# Altium PCB IR_detector_16ch.PcbDoc
Units mm, origin at the board's own origin, x right, y up, seen from the top; angles counter-clockwise.
Board outline 135 x 44 mm, 2 copper layers (Top Layer, Bottom Layer); 73 components, 68 nets, 390 pads, 179 vias.
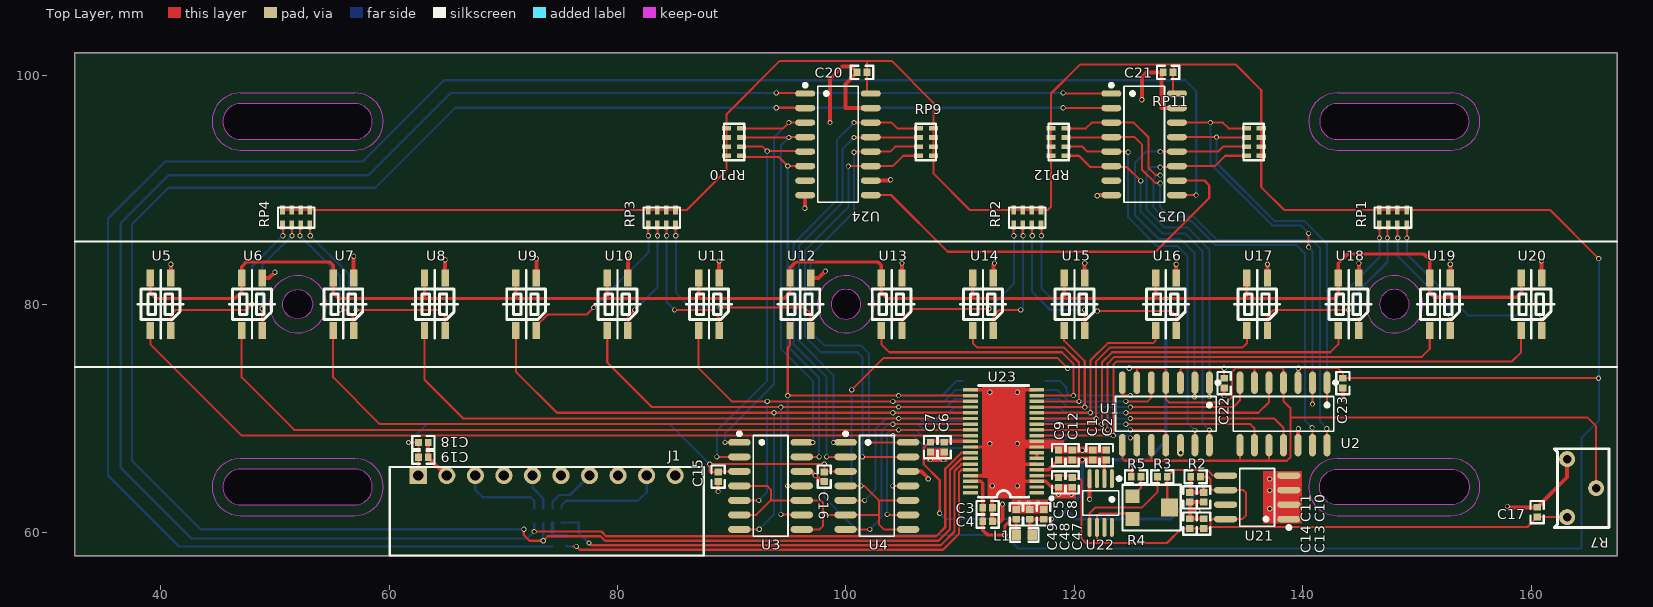
[diagram p0: Top Layer view]
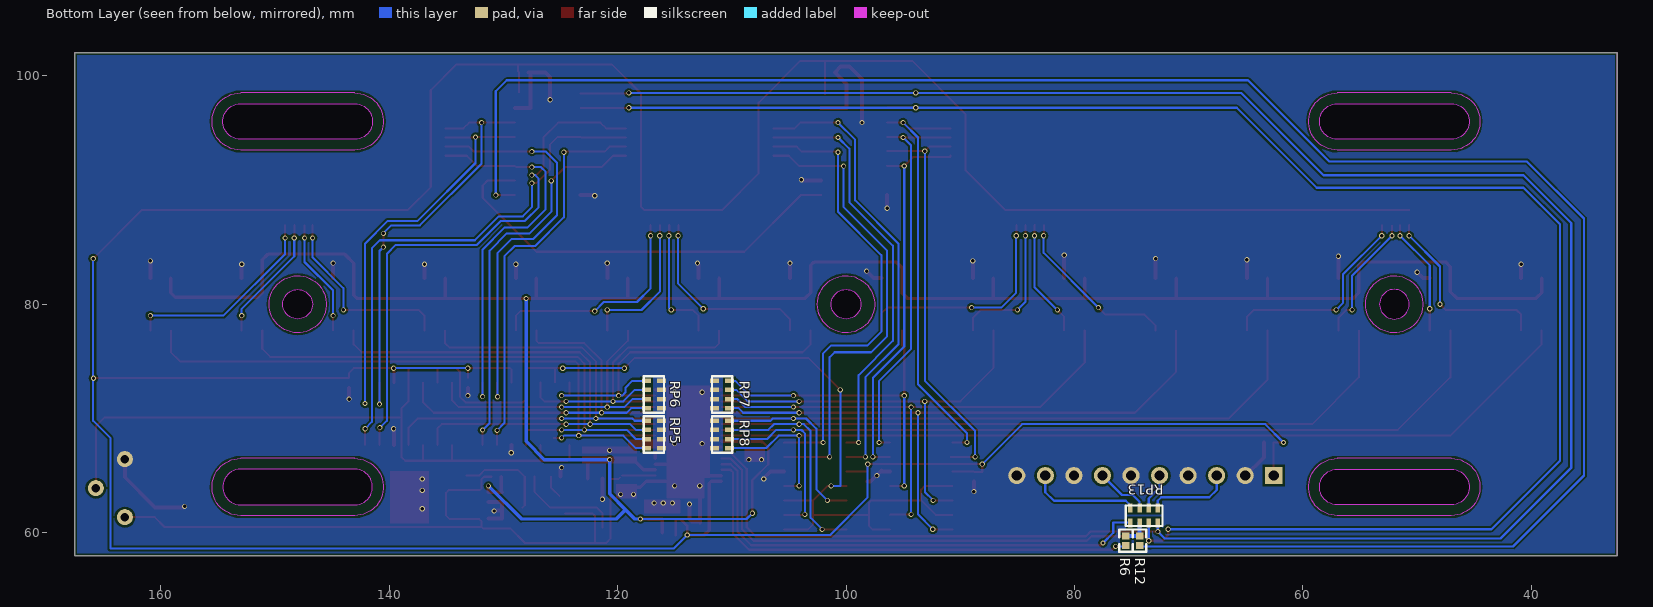
[diagram p1: Bottom Layer view, seen from below]

## Layer stack, top to bottom
Top Solder: solder mask 0.0102, Solder Resist, Dk 3.5
Top Layer: signal copper 0.0356
Dielectric 1: dielectric 0.32, FR-4, Dk 4.8
Bottom Layer: signal copper 0.0356
Bottom Solder: solder mask 0.0102, Solder Resist, Dk 3.5

## Board outline
32.5,58 167.5,58 167.5,102 32.5,102
cut-out: 146.7,80 ccw(c148,80) 148,78.7 ccw(c148,80) 149.3,80 ccw(c148,80) 148,81.3 ccw(c148,80)
cut-out: 98.7,80 ccw(c100,80) 100,78.7 ccw(c100,80) 101.3,80 ccw(c100,80) 100,81.3 ccw(c100,80)
cut-out: 52,78.7 cw(c52,80) 50.7,80 cw(c52,80) 52,81.3 cw(c52,80) 53.3,80 cw(c52,80)
cut-out: 47,94.45 57,94.45 ccw(c57,96) 57,97.55 47,97.55 ccw(c47,96)
cut-out: 143,94.45 153,94.45 ccw(c153,96) 153,97.55 143,97.55 ccw(c143,96)
cut-out: 143,62.45 cw(c143,64) 143,65.55 153,65.55 cw(c153,64) 153,62.45
cut-out: 47,62.45 57,62.45 ccw(c57,64) 57,65.55 47,65.55 ccw(c47,64)

## Design rules (kind name [scope] priority, off if disabled: settings)
AcuteAngle [All] p1: minimum=7.00000000000000E+0001 checktracksonly=FALSE
Clearance RF [InNetClass('RF') vs InNet('GND')] p1: gap=0.2
Clearance [All] p2: gap=0.15 except(0.1: Track-Track; 0.18: Arc-Via Via-Poly SMDPad-Via Track-Via Via-Fill THPad-Via Via-Via Via-Text; 0.2: THPad-Poly Arc-THPad THPad-Text SMDPad-THPad THPad-Fill Track-THPad THPad-THPad; 0.25: Region-Text; 0.5: Arc-Region Poly-Region THPad-Region Region-Region Text-Text Fill-Region SMDPad-Region Via-Region Track-Region)
ComponentClearance [All] p1: gap=0 collisioncheckmode=3 verticalgap=0 showdistances=FALSE
DiffPairsRouting [All] p1: maxlimit=0.254 minlimit=0.2 mostfreqgap=0.2 toplayer_minwidth=0.2 toplayer_maxwidth=0.381 toplayer_prefwidth=0.2 bottomlayer_minwidth=0.2 bottomlayer_maxwidth=0.381 bottomlayer_prefwidth=0.2 maxuncoupledlength=5
Height [All] p1: minheight=0 maxheight=254 prefheight=12.7
HoleSize [All] p1: absolutevalues=TRUE maxlimit=6.3 minlimit=0.2 maxpercent=80.000 minpercent=20.000
HoleToHoleClearance [All] p1: gap=0.2 allowstackedmicrovias=TRUE
MinimumSolderMaskSliver [All] p1: minsoldermaskwidth=0.089
PlaneConnect [All] p1: planeconnectstyle=Direct reliefexpansion=0.508 reliefentries=4 reliefconductorwidth=0.254 reliefairgap=0.254
PolygonConnect [All] p1: connectstyle=Direct reliefconductorwidth=0.254 reliefentries=4 polygonreliefangle="90 Angle" airgapwidth=0.254
RoutingVias [All] p1: holewidth=0.3 width=0.45 viastyle="Through Hole" minholewidth=0.3 minwidth=0.4 maxholewidth=0.711 maxwidth=1.27
SilkToBoardRegionClearance [All] p1 off:
SilkToSilkClearance [All] p1: silktosilkclearance=0
SilkToSolderMaskClearance [IsPad] p1: minsilkscreentomaskgap=0 clearancetoexposedcopper=TRUE
SolderMaskExpansion [All] p1: expansion=0.102
UnpouredPolygon [All] p1: allowunpoured=FALSE
UnpouredPolygon BoardOutlineClearance [All] p2: allowunpoured=FALSE
Width [All] p1: maxlimit=100 minlimit=0.13 preferedwidth=0.18
19 further rules are at their usual default settings.

## Components (designator, comment, footprint, x,y, rotation, side; value= is the part's Value field where it differs from the comment)
C1 "1uF" 0402 121.6,66.8 r270 top
C2 "0.1uF" 0402 122.8,66.8 r270 top
C3 "1uF" 0402 112.4,62.2 r0 top
C4 "0.1uF" 0402 112.4,61 r0 top
C5 "0.1uF" 0402 118.6,64.4 r90 top
C6 "1uF" 0402 108.6,67.5 r270 top
C7 "0.1uF" 0402 107.4,67.5 r270 top
C8 "10uF" 0402 119.8,64.4 r90 top
C9 "1uF" 0402 118.6,66.8 r90 top
C10 "(NC)0.1uF" 0402 131.3,63.1 r90 top
C11 "(NC)1uF" 0402 130.1,63.1 r90 top
C12 "0.1uF" 0402 119.8,66.8 r90 top
C13 "(NC)1uF" 0402 131.3,60.8 r270 top
C14 "(NC)0.1uF" 0402 130.1,60.8 r270 top
C15 "(NC)0.1uF" 0402 88.8,64.9 r90 top
C16 "(NC)0.1uF" 0402 98.1,64.9 r90 top
C17 "(NC)0.1uF" 0402 160.5,61.8 r270 top
C18 "1uF" 0402 63,67.9 r180 top
C19 "0.1uF" 0402 63,66.6 r180 top
C20 "(NC)0.1uF" 0402 101.4,100.3 r0 top
C21 "(NC)0.1uF" 0402 128.2,100.3 r0 top
C22 "(NC)0.1uF" 0402 133.1,73.1 r90 top
C23 "(NC)0.1uF" 0402 143.5,73.1 r90 top
C47 "10uF" 0402 117.3,61.6 r270 top
C48 "0.1uF" 0402 116.1,61.6 r270 top
C49 "1uF" 0402 114.9,61.6 r270 top
J1 "XH_10P" XH_10P直插弯针 73.8,65 r0 top
L1 "10uH" 0603 115.6,59.8 r0 top
R2 "(NC)150" 0402 130.6,64.9 r180 top
R3 "(NC)470" 0402 127.7,64.9 r0 top
R4 "(NC)10K" 3x3_ResPot 126.7,62.2 r270 top
R5 "(NC)1k" 0402 125.4,64.9 r0 top
R6 "0" 0402 75.5,59.3 r90 bottom
R7 "(NC)10K" 3362W-TH_3P-L7.1-W6.9-P2.54-BL-BS 164.4,63.9 r270 top
R12 "(NC)0" 0402 74.3,59.3 r90 bottom
RP1 "180" 8P4R-0603 147.873,87.6 r90 top
RP2 "180" 8P4R-0603 115.873,87.6 r90 top
RP3 "180" 8P4R-0603 83.873,87.6 r90 top
RP4 "180" 8P4R-0603 51.873,87.6 r90 top
RP5 "6.8K" 8P4R-0603 116.8,68.6 r180 bottom
RP6 "6.8K" 8P4R-0603 116.8,72.1 r180 bottom
RP7 "6.8K" 8P4R-0603 110.85,72.1 r0 bottom
RP8 "6.8K" 8P4R-0603 110.85,68.6 r0 bottom
RP9 "(NC)1K" 8P4R-0603 107,94.2 r0 top
RP10 "(NC)1K" 8P4R-0603 90.2,94.2 r180 top
RP11 "(NC)1K" 8P4R-0603 135.7,94.2 r0 top
RP12 "(NC)1K" 8P4R-0603 118.6,94.2 r180 top
RP13 "22" 8P4R-0603 73.9,61.5 r90 bottom
U1 "(NC)LM339" SOP-14_L8.6-W3.9-P1.27-LS6.0-BL 128,70.4 r180 top
U2 "(NC)LM339" SOP-14_L8.6-W3.9-P1.27-LS6.0-BL 138.3,70.4 r180 top
U3 "(NC)LM339" SOP-14_L8.6-W3.9-P1.27-LS6.0-BL 93.4,64.1 r270 top
U4 "(NC)LM339" SOP-14_L8.6-W3.9-P1.27-LS6.0-BL 102.7,64.1 r270 top
U5 "ITR8307/S17/TR8(B)" OPTO-SMD_ITR8307-S17-TR8-B-TS 40,80 r90 top
U6 "ITR8307/S17/TR8(B)" OPTO-SMD_ITR8307-S17-TR8-B-TS 48,80 r90 top
U7 "ITR8307/S17/TR8(B)" OPTO-SMD_ITR8307-S17-TR8-B-TS 56,80 r90 top
U8 "ITR8307/S17/TR8(B)" OPTO-SMD_ITR8307-S17-TR8-B-TS 64,80 r90 top
U9 "ITR8307/S17/TR8(B)" OPTO-SMD_ITR8307-S17-TR8-B-TS 72,80 r90 top
U10 "ITR8307/S17/TR8(B)" OPTO-SMD_ITR8307-S17-TR8-B-TS 80,80 r90 top
U11 "ITR8307/S17/TR8(B)" OPTO-SMD_ITR8307-S17-TR8-B-TS 88,80 r90 top
U12 "ITR8307/S17/TR8(B)" OPTO-SMD_ITR8307-S17-TR8-B-TS 96,80 r90 top
U13 "ITR8307/S17/TR8(B)" OPTO-SMD_ITR8307-S17-TR8-B-TS 104,80 r90 top
U14 "ITR8307/S17/TR8(B)" OPTO-SMD_ITR8307-S17-TR8-B-TS 112,80 r90 top
U15 "ITR8307/S17/TR8(B)" OPTO-SMD_ITR8307-S17-TR8-B-TS 120,80 r90 top
U16 "ITR8307/S17/TR8(B)" OPTO-SMD_ITR8307-S17-TR8-B-TS 128,80 r90 top
U17 "ITR8307/S17/TR8(B)" OPTO-SMD_ITR8307-S17-TR8-B-TS 136,80 r90 top
U18 "ITR8307/S17/TR8(B)" OPTO-SMD_ITR8307-S17-TR8-B-TS 144,80 r90 top
U19 "ITR8307/S17/TR8(B)" OPTO-SMD_ITR8307-S17-TR8-B-TS 152,80 r90 top
U20 "ITR8307/S17/TR8(B)" OPTO-SMD_ITR8307-S17-TR8-B-TS 160,80 r90 top
U21 "(NC)LT1009" SOP-8_L5.0-W4.0-P1.27-LS6.0-BL 136,63.1 r90 top
U22 "REF5030" VSSOP-8_L3.0-W3.0-P0.65-LS5.0-BL 122.3,62.6 r180 top
U23 "ADS7953SBDBT" TSSOP-38_L9.7-W4.4-P0.50-LS6.4-BL 113.8,68 r90 top locked
U24 "(NC)74HC165" SOP-16_L10.0-W3.9-P1.27-LS6.0-BL 99.3,94 r270 top
U25 "(NC)74HC165" SOP-16_L10.0-W3.9-P1.27-LS6.0-BL 126.1,94 r270 top

## Footprints (in the part's own frame and the unit in brackets; to place one, negate y for a bottom-side part, rotate by r counter-clockwise, add the part's x,y. Pads: shape width x height; smd on the part's side, far side on the other; paste and mask are expansions set on the pad)
3x3_ResPot [mm]
  rect 1.2x1.2 smd: 1(-1,-1.625) 3(1,-1.625)
  rect 1.6x1.5 smd: 2(0,1.625)
  silkscreen extent -2,-2.5 2,2.6
8P4R-0603 [mm]
  rect 0.8x0.4 smd: 1(-0.65,1.2) 2(-0.65,0.4) 3(-0.65,-0.4) 4(-0.65,-1.2) 5(0.65,-1.2) 6(0.65,-0.4) 7(0.65,0.4) 8(0.65,1.2)
  silkscreen extent -0.9,-1.6 0.87,1.6
0402 [mm]
  rect 0.6x0.65 smd mask+0.051: 1(-0.425,0) 2(0.425,0)
  silkscreen extent -0.97,-0.57 0.98,0.58
0603 [mm] "0603 1.6x0.8mm"
  rect 0.8x0.9 smd: 1(-0.7,0) 2(0.7,0)
  silkscreen extent -1.25,-0.6 1.25,0.6
3362W-TH_3P-L7.1-W6.9-P2.54-BL-BS [mm] "3362W"
  round 1.4 hole 0.762: 1(-2.54,-1.27) 2(0,1.27) 3(2.54,-1.27)
  silkscreen extent -3.45,-2.4 3.45,2.4
OPTO-SMD_ITR8307-S17-TR8-B-TS [mm]
  rect 1.5x0.65 smd: 1(2.3,-0.9) 2(-2.3,-0.9) 3(2.3,0.9) 4(-2.3,0.9)
  silkscreen extent -1.35,-1.7 1.35,1.7
SOP-8_L5.0-W4.0-P1.27-LS6.0-BL [mm]
  oval 0.574x2.036 smd: 1(-1.905,-2.768) 2(-0.635,-2.768) 3(0.635,-2.768) 4(1.905,-2.768) 5(1.905,2.768) 6(0.635,2.768) 7(-0.635,2.768) 8(-1.905,2.768)
  silkscreen extent -2.79,-2.92 2.53,1.52
SOP-14_L8.6-W3.9-P1.27-LS6.0-BL [mm]
  oval 0.595x1.968 smd: 1(-3.81,-2.734) 2(-2.54,-2.734) 3(-1.27,-2.734) 4(0,-2.734) 5(1.27,-2.734) 6(2.54,-2.734) 7(3.81,-2.734) 8(3.81,2.734) 9(2.54,2.734) 10(1.27,2.734) 11(0,2.734) 12(-1.27,2.734) 13(-2.54,2.734) 14(-3.81,2.734)
  silkscreen extent -4.71,-2.88 4.4,1.52
SOP-16_L10.0-W3.9-P1.27-LS6.0-BL [mm]
  oval 0.56x1.745 smd: 1(-4.445,-2.873) 2(-3.175,-2.873) 3(-1.905,-2.873) 4(-0.635,-2.873) 5(0.635,-2.873) 6(1.905,-2.873) 7(3.175,-2.873) 8(4.445,-2.873) 9(4.445,2.873) 10(3.175,2.873) 11(1.905,2.873) 12(0.635,2.873) 13(-0.635,2.873) 14(-1.905,2.873) 15(-3.175,2.873) 16(-4.445,2.873)
  silkscreen extent -5.33,-3.02 5.08,1.77
TSSOP-38_L9.7-W4.4-P0.50-LS6.4-BL [mm]
  rect 0.3x1.3 smd: 1(-4.501,-2.899) 2(-3.999,-2.901) 3(-3.498,-2.901) 4(-2.999,-2.901) 5(-2.499,-2.901) 6(-1.999,-2.901) 7(-1.499,-2.901) 8(-0.999,-2.901) 9(-0.499,-2.901) 10(0.001,-2.901) 11(0.501,-2.901) 12(1.001,-2.901) 13(1.501,-2.901) 14(2.001,-2.901) 15(2.501,-2.901) 16(3.001,-2.901) 17(3.501,-2.901) 18(4.001,-2.901) 19(4.501,-2.901) 20(4.5,2.899) 21(4.001,2.9) 22(3.501,2.899) 23(3.002,2.899) 24(2.499,2.901) 25(2,2.9) 26(1.5,2.9) 27(1,2.9) 28(0.5,2.9) 29(0,2.9) 30(-0.5,2.9) 31(-1,2.9) 32(-1.5,2.9) 33(-2,2.9) 34(-2.5,2.9) 35(-3,2.9) 36(-3.5,2.9) 37(-4,2.9) 38(-4.5,2.9)
  silkscreen extent -5.14,-4.34 4.9,2.2
VSSOP-8_L3.0-W3.0-P0.65-LS5.0-BL [mm]
  oval 0.364x1.662 smd: 1(-0.975,-2.131) 2(-0.325,-2.131) 3(0.325,-2.131) 4(0.975,-2.131) 5(0.975,2.131) 6(0.325,2.131) 7(-0.325,2.131) 8(-0.975,2.131)
  silkscreen extent -1.76,-2.28 1.58,1.07
XH_10P直插弯针 [mm]
  rect 1.5x1.5 hole 0.9: 1(-11.25,0)
  round 1.5 hole 0.9: 2(-8.75,0) 3(-6.25,0) 4(-3.75,0) 5(-1.25,0) 6(1.25,0) 7(3.75,0) 8(6.25,0) 9(8.75,0) 10(11.25,0)
  silkscreen extent -13.75,-7 13.75,0.75

## Part data
C1 C2 C3 C4 C5 C6 C7 C8 C9 C10 C11 C12 C13 C14 C15 C16 C17 C18 C19 C20 C21 C22 C23 C47 C48 C49: library part Cap
L1: library part Inductor, "Inductor"
R2 R3 R5 R6 R12: library part Res, "Resistor"
R4 R7: library part ResPot
RP1 RP2 RP3 RP4 RP5 RP6 RP7 RP8 RP9 RP10 RP11 RP12 RP13: library part 8P4R_F
U1 U2 U3 U4: library part LM339
U21: library part LT1009-SOP8
U22: library part REF50xx
U23: "12 bit, 1 MSPS, 16 ch, single ended, micro power, sr i/f, SAR ADC"
U24 U25: library part 74_165, "8-bit parallel-in/serial-out shift register"

## Via types
v1: diameter 0.45, hole 0.3, Top Layer to Bottom Layer, tented both sides, 179 vias

## Nets (pads, with @x,y where several pads share a name; then routed paths per layer and width w, separated by ;. In a path a pad name is that pad's centre, name@x,y a point inside that pad or via, vN(x,y) a via of type N, cw(c..) or ccw(c..) an arc to the next point about the centre after c; other vN are vias at no path point)
AGND: C1.1 C2.1 C3.2 C4.2 C5.1 C6.2 C7.2 C8.1 C9.2 C10.1 C11.1 C12.2 C13.1 C14.1 C15.1 C16.1 C17.1 C18.1 C19.1 C20.1 C21.1 C22.1 C23.1 C47.1 C48.1 C49.1 J1.2 J1.4 J1.6 J1.8 J1.10 R5.1 R7.1 RP5.5 RP5.6 RP5.7 RP5.8 RP6.5 RP6.6 RP6.7 RP6.8 RP7.5 RP7.6 RP7.7 RP7.8 RP8.5 RP8.6 RP8.7 RP8.8 U1.12 U2.12 U3.12 U4.12 U5.1 U6.1 U7.1 U8.1 U9.1 U10.1 U11.1 U12.1 U13.1 U14.1 U15.1 U16.1 U17.1 U18.1 U19.1 U20.1 U21.1 U21.2 U21.3 U21.4 U22.4 U23.3 U23.6 U23.9 U23.10 U23.19 U23.20 U23.30 U23.35 U24.8 U24.10 U24.15 U25.8 U25.15 | length 93
  Top Layer w0.3: U23.35 112.9,65 ; U23.30 112.1,67.5 ; U23.20 112.1,72.5 ; 115.101,66.001 U23.6 ; 115.401,72.501 U23.19 ; 115.402,64.502 U23.3 117.498,64.502 118.025,63.975 C5.1 C8.1
  Top Layer w0.35: U5.1 v1(40.9,83.5) ; U6.1 49.5,82.3 v1(50,82.8) ; U7.1 v1(56.9,84.2) ; C18.1 C19.1 65.025,65 J1.2 ; U8.1 v1(64.9,83.9) ; U9.1 v1(72.9,84) ; U10.1 v1(80.9,84.3) ; v1(88.8,63.6) C15.1 ; U11.1 v1(88.9,83.8) ; U3.12 96.9,65.37 96.9,65.44 97.865,64.475 C16.1 ; v1(96.4,88.4) 96.427,88.427 U24.8 ; U12.1 97.6,82.3 v1(98.2,82.9) ; v1(98.6,95.9) 98.6,99.7 99.7,100.8 100.475,100.8 C20.1 99.975,99.3 99.975,97.175 U24.15 ; U24.10 103.825,90.825 v1(103.9,90.9) ; U13.1 v1(104.9,83.6) ; U4.12 106.63,65.37 107.2,64.8 v1(107.2,64.7) ; C4.2@112.8,60.9 112.8,63.4 ; C4.2 113.484,61 113.7,61.216 v1(113.7,62.5) ; U14.1 112.9,83.5 v1(113,83.6) ; U15.1 v1(120.9,83.6) ; v1(121.325,62.925) U22.4 ; v1(122,89.5) 122.055,89.555 U25.8 ; v1(124.9,65.7) 124.975,65.625 R5.1 ; v1(125.9,97.9) 125.9,99.9 126.3,100.3 C21.1 127.625,100.15 127.625,97.175 U25.15 ; U16.1 v1(128.9,83.5) ; U1.12 129.27,67.03 v1(129.3,67) ; v1(130.8,61.9) 130.75,61.95 130.1,61.95 ; C13.1 C14.1 130.1,61.95 ; C10.1 C11.1 130.1,61.95 ; v1(133.1,72) C22.1 ; U17.1 v1(136.9,83.5) ; U2.12 139.57,69.07 v1(139.6,69.1) ; v1(143.5,71.7) C23.1 ; U18.1 v1(144.9,83.6) ; U19.1 v1(152.9,83.5) ; v1(157.9,62.3) 157.975,62.225 C17.1 163.13,64.855 R7.1 ; U20.1 v1(160.9,83.8)
  other v1: 137.1,62.1 115.2,62.6 116,62.6 116.8,62.6 118.6,63.35 119.725,63.35 137.1,63.7 112.8,64.1 115,64.1 137.1,64.7 97.3,65 107.4,66.4 108.5,66.4 120.7,67.2 112.6,67.8 115,67.8 112.6,72.3 115,72.3
AVCC: C1.2 C2.2 C6.1 C7.1 C9.1 C10.2 C11.2 C12.1 C47.2 C48.2 L1.2 R2.2 U5.3 U6.3 U7.3 U8.3 U9.3 U10.3 U11.3 U12.3 U13.3 U14.3 U15.3 U16.3 U17.3 U18.3 U19.3 U20.3 U22.2 U23.5 U23.29 | length 225.5
  Top Layer w0.2: C7.1 107.271,67.925 106.8,67.454 106.8,66 108.195,64.605 v1(108.195,61.705)
  Top Layer w0.3: U5.3 39.1,81 39.6,80.5 46.5,80.5 47.1,81.1 U6.3 47.1,83.3 47.5,83.7 54.8,83.7 55.1,83.4 55.1,81 55.6,80.5 94.6,80.5 95.1,81 U12.3 95.1,83.2 95.6,83.7 102.8,83.7 103.1,83.4 103.1,81 103.6,80.5 v1(128,80.5) 135.1,80.5 ; 63.1,80.6 U8.3 ; 71.1,80.5 U9.3 ; 79.1,80.5 U10.3 ; 87.1,80.5 U11.3 ; C7.1@107.4,68 U23.29 ; 111.1,80.6 U14.3 ; L1.2@116.1,60 C48.2 C47.2 ; U23.5 117.726,65.501 C9.1 ; C47.2@117.325,61.2 v1(118,61.2) v1@117.975,61.175 ; 119.1,80.5 U15.3 ; U22.2 C2.2@122.625,66.2 ; 127.1,80.5 U16.3 ; C11.2 C10.2 v1(131.3,64.1) ; C11.2@130.175,63.6 R2.2 ; U17.3 135.1,80.5 ; U20.3 159.1,81 158.7,80.6 151.5,80.6 151.1,81 151.1,83.9 150.6,84.4 143.9,84.4 143.1,83.6 143.1,80.8 142.8,80.5 135.1,80.5
  Bottom Layer w0.2: v1(108.195,61.705) 108.7,61.2 v1(118,61.2)
  Bottom Layer w0.3: v1(118,61.2) 118.5,61.2 119.3,62 ; v1(128,80.5) 128,68 126.4,66.4 v1(120.7,66.4) 120.7,63.4 119.3,62 ; v1(131.3,64.1) 128.4,61.2 120.1,61.2 119.3,62
C\S\/L\D\: RP13.4 U23.31 U24.1 U25.1 | length 199.4
  Top Layer w0.2: v1(72.7,60.1) 78.6,60.1 79,59.7 107.9,59.7 108.7,60.5 108.7,65.6 110.1,67 U23.31 ; v1(93.9,98.5) U24.1@96.372,98.5 ; v1(119,98.5) 119.055,98.445 U25.1
  Bottom Layer w0.2: RP13.4@72.7,60.8 v1(72.7,60.1) 72.1,59.5 42.7,59.5 36.5,65.7 36.5,87.1 40.7,91.3 58.2,91.3 65.4,98.5 v1(93.9,98.5) v1(119,98.5)
DVCC: C3.1 C4.1 C15.2 C16.2 C18.2 C19.2 C20.2 C21.2 C22.2 C23.2 C49.2 J1.1 L1.1 RP1.5 RP1.6 RP1.7 RP1.8 RP2.5 RP2.6 RP2.7 RP2.8 RP3.5 RP3.6 RP3.7 RP3.8 RP4.5 RP4.6 RP4.7 RP4.8 RP9.5 RP9.6 RP9.7 RP9.8 RP10.5 RP10.6 RP10.7 RP10.8 RP11.5 RP11.6 RP11.7 RP11.8 RP12.5 RP12.6 RP12.7 RP12.8 U1.3 U2.3 U3.3 U4.3 U23.36 U24.16 U25.16 | length 357.6
  Top Layer w0.18: RP4.8 RP4.7 RP4.6 RP4.5 RP3.8 RP3.7 RP3.6 RP3.5 86.05,88.25 89.55,91.75 RP10.8 RP10.7 RP10.6 RP10.5 89.55,96.65 94.2,101.3 101.825,101.3 ; v1(61.7,67.9) C18.2 C19.2 62.575,65.025 J1.1 ; U3.3 88.845,65.37 C15.2 88.075,65.325 v1(88.075,66) v1(98.1,66) ; v1(98.1,66) C16.2 98.145,65.37 U4.3 ; U24.16@101.825,98.4 C20.2 101.825,101.3 ; U25.16@128.625,98.525 C21.2 128.7,100.375 128.7,101 ; U1.3 129.27,74.27 129.4,74.4 v1(133.1,74.4) C22.2 ; v1@139.57,74.37 v1(139.6,74.4) 143.1,74.4 143.5,74 C23.2 v1(165.875,73.525) ; v1(165.9,84) 161.65,88.25 RP1.5 RP1.6 RP1.7 RP1.8 138.35,88.25 136.35,90.25 RP11.5 RP11.6 RP11.7 RP11.8 136.35,98.75 134.1,101 128.7,101 ; 101.825,101.3 104,101.3 107.65,97.65 RP9.8 RP9.7 RP9.6 RP9.5 107.65,91.45 110.85,88.25 RP2.8 RP2.7 RP2.6 RP2.5 117.65,88.25 117.95,88.55 RP12.8 RP12.7 RP12.6 RP12.5 117.95,98.45 120.5,101 128.7,101
  Top Layer w0.25: v1(113.9,59.8) 113.9,60.6 114.475,61.175 C49.2 L1.1 ; U2.3 v1@139.57,74.37
  Top Layer w0.3: U23.36 111.8,64.5 111.975,64.325 C4.1 111.975,60.225 112.4,59.8 v1(113.9,59.8)
  Bottom Layer w0.18: v1(61.7,67.9) 63.3,69.5 84.575,69.5 v1(88.075,66) ; v1(98.1,66) 98.1,63.1 101.405,59.795 113.895,59.795 v1(113.9,59.8) 115.1,58.6 164.4,58.6 164.4,68.3 165.9,69.8 v1(165.9,84) ; v1(133.1,74.4) v1(139.6,74.4)
LED_A_0: RP4.1 U5.2 | length 17
  Top Layer w0.18: U5.2 40.9,79.1 41.3,79.5 47.5,79.5 v1(48,80) ; RP4.1 50.7,86.923 v1(50.7,86)
  Bottom Layer w0.18: v1(48,80) 48,83.3 v1(50.7,86)
LED_A_1: RP4.2 U6.2 | length 10.3
  Top Layer w0.18: U6.2 v1(48.9,79.6) ; v1(51.5,86) RP4.2@51.5,86.923
  Bottom Layer w0.18: v1(48.9,79.6) 48.9,83.4 v1(51.5,86)
LED_A_2: RP4.3 U7.2 | length 11.4
  Top Layer w0.18: v1(52.2,86) RP4.3@52.2,86.877 ; v1(55.7,79.5) 56.2,79.5 56.9,78.8 U7.2
  Bottom Layer w0.18: v1(52.2,86) 55.7,82.5 v1(55.7,79.5)
LED_A_3: RP4.4 U8.2 | length 18.4
  Top Layer w0.18: RP4.4 53.073,86.027 v1(53.1,86) ; v1(57.1,79.5) 64.3,79.5 64.9,78.9 U8.2
  Bottom Layer w0.18: v1(53.1,86) 56.5,82.6 56.5,80.1 v1(57.1,79.5)
LED_A_4: RP3.1 U9.2 | length 15.3
  Top Layer w0.18: U9.2 72.9,78.1 73.9,79.1 77.3,79.1 v1(77.9,79.7) ; RP3.1 82.673,86.027 v1(82.7,86)
  Bottom Layer w0.18: v1(77.9,79.7) 82.7,84.5 v1(82.7,86)
LED_A_5: RP3.2 U10.2 | length 10.3
  Top Layer w0.18: U10.2 80.9,78.9 v1(81.5,79.5) ; RP3.2 83.5,86.923 v1(83.5,86)
  Bottom Layer w0.18: v1(81.5,79.5) 83.5,81.5 v1(83.5,86)
LED_A_6: RP3.3 U11.2 | length 13
  Top Layer w0.18: RP3.3 84.3,86.923 v1(84.3,86) ; v1(85,79.5) 88.2,79.5 88.9,78.8 U11.2
  Bottom Layer w0.18: v1(84.3,86) 84.3,80.2 v1(85,79.5)
LED_A_7: RP3.4 U12.2 | length 20
  Top Layer w0.18: RP3.4 85.073,86.027 v1(85.1,86) ; v1(89,79.7) 96.4,79.7 96.9,79.2 U12.2
  Bottom Layer w0.18: v1(85.1,86) 85.1,81 86.4,79.7 v1(89,79.7)
LED_A_8: RP2.1 U13.2 | length 17.2
  Top Layer w0.18: U13.2 104.9,78.7 105.8,79.6 v1(112.5,79.6) ; RP2.1 114.673,86.027 v1(114.7,86)
  Bottom Layer w0.18: v1(112.5,79.6) 114.7,81.8 v1(114.7,86)
LED_A_9: RP2.2 U14.2 | length 11.5
  Top Layer w0.18: U14.2 112.9,79 113.4,79.5 v1(115.3,79.5) ; RP2.2 115.473,86.027 v1(115.5,86)
  Bottom Layer w0.18: v1(115.3,79.5) 115.5,79.7 v1(115.5,86)
LED_A_10: RP2.3 U15.2 | length 12.9
  Top Layer w0.18: RP2.3 116.273,86.027 v1(116.3,86) ; U15.2 v1(120.9,79.5)
  Bottom Layer w0.18: v1(116.3,86) 116.3,81.1 117.9,79.5 v1(120.9,79.5)
LED_A_11: RP2.4 U16.2 | length 19.6
  Top Layer w0.18: v1(117.1,86) RP2.4@117.1,86.923 ; v1(122,79.4) 128.5,79.4 128.9,79 U16.2
  Bottom Layer w0.18: v1(117.1,86) 117.1,81.4 118.3,80.2 121.2,80.2 v1(122,79.4)
LED_A_12: RP1.1 U17.2 | length 17.2
  Top Layer w0.18: U17.2 136.9,79 137.4,79.5 v1(144,79.5) ; v1@146.673,85.827 v1(146.7,85.8) RP1.1@146.7,86.923
  Bottom Layer w0.18: v1(144,79.5) 144,81.4 146.7,84.1 v1(146.7,85.8)
LED_A_13: RP1.2 U18.2 | length 10.2
  Top Layer w0.18: U18.2 v1(144.9,79) ; v1(147.4,85.8) RP1.2@147.4,86.877
  Bottom Layer w0.18: v1(144.9,79) 144.9,81.2 147.4,83.7 v1(147.4,85.8)
LED_A_14: RP1.3 U19.2 | length 11.2
  Top Layer w0.18: RP1.3 148.273,85.827 v1(148.3,85.8) ; U19.2 v1(152.9,79)
  Bottom Layer w0.18: v1(148.3,85.8) 148.3,84.2 152.9,79.6 v1(152.9,79)
LED_A_15: RP1.4 U20.2 | length 17.9
  Top Layer w0.18: v1(149.1,85.8) RP1.4@149.1,86.923 ; U20.2 v1(160.9,79)
  Bottom Layer w0.18: v1(149.1,85.8) 149.1,84.4 154.5,79 v1(160.9,79)
NetJ1_3: J1.3 RP13.5 | length 7.4
  Bottom Layer w0.2: J1.3 67.55,63.75 68.2,63.1 72.4,63.1 72.7,62.8 RP13.5
NetJ1_5: J1.5 RP13.6 | length 3.2
  Bottom Layer w0.2: J1.5 72.55,63.95 73.5,63 RP13.6
NetJ1_7: J1.7 RP13.7 | length 4.8
  Bottom Layer w0.2: RP13.7 74.3,62.7 74.9,63.3 75.85,63.3 J1.7
NetJ1_9: J1.9 RP13.8 | length 9.6
  Bottom Layer w0.2: RP13.8 75.1,62.4 75.5,62.8 81.8,62.8 82.55,63.55 J1.9
NetR3_1: R3.1 U22.5 | length 9.3
  Top Layer w0.18: U22.5 121.325,61.725 121.8,62.2 125.9,62.2 127.275,63.575 R3.1
NetR3_2: R3.2 R4.2 U21.5 | length 8.3
  Top Layer w0.18: R4.2 128.125,62.4 R3.2 128.725,65.5 131.61,65.5 132.105,65.005 U21.5
NetR4_1: R4.1 R5.2 | length 2
  Top Layer w0.18: R4.1 125.825,63.95 R5.2
NetR6_1: R6.1 U23.34 | length 41.9
  Top Layer w0.2: 76.1,58.8 v1(76.4,58.8) 76.7,58.5 86.4,58.5 108.5,58.5 109.9,59.9 109.9,65.3 110.1,65.5 U23.34
  Bottom Layer w0.2: R6.1 75.575,58.8 v1(76.4,58.8)
NetR7_2: R7.2 U1.4 U1.6 U1.8 U1.10 U2.4 U2.6 U2.8 U2.10 U3.4 U3.6 U3.8 U3.10 U4.4 U4.6 U4.8 U4.10 | length 148.3
  Top Layer w0.18: U3.6 92.16,61.56 93.43,62.83 ; U3.4 93.1,64.1 93.43,63.77 93.43,62.83 ; U3.8 97.69,60.29 98,60.6 98,61.56 ; U4.4 v1(101.3,64.1) 101.6,64.1 102.87,62.83 ; v1(100.5,72.5) 103.3,75.3 118.5,75.3 v1(119.4,74.4) ; 102.81,61.56 U4.6 98,61.56 ; U4.8 103.31,60.29 102.87,60.73 102.87,62.83 ; U4.10 102.87,62.83 ; U1.8 124.19,66.51 124.4,66.3 134.49,66.3 ; v1(124.8,74.4) 125.46,74.4 ; U1.6 125.46,74.4 ; 126.73,66.43 U1.10 ; U2.8 134.49,66.3 ; U2.6 135.76,74.4 ; 137.03,66.33 U2.10 ; R7.2 165.67,69.33 164.9,70.1 138.925,70.1 ; 93.43,62.83 U3.10 97.77,62.83 98,62.6 98,61.56 ; 125.46,74.4 127.9,74.4 128,74.3 U1.4 128,71.7 128.3,71.4 133.3,71.4 133.8,71.9 133.8,74.1 134.1,74.4 135.76,74.4 ; 134.49,66.3 138.6,66.3 138.925,66.625 138.925,70.1 ; 135.76,74.4 138.2,74.4 138.3,74.3 U2.4 138.3,71.5 138.925,70.875 138.925,70.1
  Bottom Layer w0.18: v1(100.5,72.5) 100.5,64.1 v1(101.3,64.1) ; v1(119.4,74.4) v1(124.8,74.4)
NetR12_1: R12.1 U25.9 | length 175.4
  Top Layer w0.2: U25.9 v1(130.655,89.555)
  Bottom Layer w0.2: R12.1@74.3,58.8 73.714,58.8 73.709,58.795 73.291,58.795 73.286,58.8 41.6,58.8 35.4,65 35.4,87.5 40.4,92.5 57.7,92.5 64.8,99.6 129.7,99.6 130.655,98.645 v1(130.655,89.555)
NetU23_7: U23.7 U23.8 | length 0.5
  Top Layer w0.3: U23.7 U23.8
NetU24_9: U24.9 U25.10 | length 37.7
  Top Layer w0.2: U24.9 103.945,89.555 108.9,84.6 127.1,84.6 131.8,89.3 131.8,90.4 131.375,90.825 U25.10
SCLK: RP13.3 U23.32 U24.2 U25.2 | length 197.7
  Top Layer w0.2: v1(71.8,60.3) 71.8,59.8 72.3,59.3 v1(73.5,59.3) 73.9,59.7 78.5,59.7 78.9,59.3 108.1,59.3 109.1,60.3 109.1,65.5 110.1,66.5 U23.32 ; v1(93.9,97.2) 96.402,97.2 U24.2 ; v1(119,97.2) 119.025,97.175 U25.2
  Bottom Layer w0.2: v1(71.8,60.3) 43.5,60.3 37.5,66.3 37.5,87 40.7,90.2 58.8,90.2 65.8,97.2 v1(93.9,97.2) v1(119,97.2) ; v1(73.5,59.3) RP13.3
SDI/NC: RP13.1 U23.33 | length 43.2
  Top Layer w0.2: v1(77.5,59.1) 77.7,58.9 108.3,58.9 109.5,60.1 109.5,65.4 110.1,66 U23.33
  Bottom Layer w0.2: RP13.1 75.15,60.9 76.6,60.9 76.6,60 v1(77.5,59.1)
SDO: R6.2 R12.2 RP13.2 | length 2.3
  Bottom Layer w0.35: RP13.2 R12.2 R6.2
SENS_A_0: RP8.1 U4.11 U5.4 U23.28 | length 88.6
  Top Layer w0.18: U5.4 39.1,76.5 47.1,68.5 U23.28 ; v1(104.1,64.1) U4.11
  Bottom Layer w0.18: v1(104.1,64.1) v1(104.1,68.5) 105.9,68.5 107,67.4 RP8.1
SENS_A_1: RP8.2 U4.9 U6.4 U23.27 | length 85.8
  Top Layer w0.18: U6.4 47.1,73.6 51.7,69 U23.27 ; v1(103.6,61.6) 103.64,61.56 U4.9
  Bottom Layer w0.18: v1(103.6,61.6) 103.6,68.7 103.895,68.995 104.595,68.995 v1(104.6,69) 106.1,69 106.9,68.2 RP8.2
SENS_A_2: RP8.3 U4.7 U7.4 U23.26 | length 80.3
  Top Layer w0.18: U7.4 55.1,73.6 59.2,69.5 U23.26 ; U4.7 v1(102.09,60.29)
  Bottom Layer w0.18: v1(102.09,60.29) 103.1,61.3 103.1,68.9 103.7,69.5 v1(104.1,69.5) 106.3,69.5 ; 106.3,69.5 106.8,69 RP8.3
SENS_A_3: RP8.4 U4.5 U8.4 U23.25 | length 69.9
  Top Layer w0.18: U8.4 63.1,73.4 66.5,70 U23.25 ; U4.5 v1(101.63,62.83)
  Bottom Layer w0.18: v1(101.63,62.83) 102.6,63.8 102.6,69.1 103.5,70 v1(104.6,70) 106.4,70 106.6,69.8 RP8.4
SENS_A_4: RP7.1 U3.7 U9.4 U23.24 | length 63.6
  Top Layer w0.18: U9.4 71.1,74.1 74.701,70.499 v1(93.7,70.499) v1(104.1,70.499) U23.24 ; U3.7 92.39,60.29 v1(92.4,60.3)
  Bottom Layer w0.18: v1(92.4,60.3) 93.7,61.6 v1(93.7,70.499) ; v1(104.1,70.499) 108.999,70.499 109.4,70.9 RP7.1
SENS_A_5: RP7.2 U3.9 U10.4 U23.23 | length 53.4
  Top Layer w0.18: U10.4 79.1,74.9 82.998,71.002 v1(104.6,71.002) U23.23 ; v1(94.3,61.6) 96.094,61.6 U3.9
  Bottom Layer w0.18: v1(94.3,61.6) v1(94.3,71) ; v1(104.6,71.002) 108.802,71.002 109.5,71.7 RP7.2
SENS_A_6: RP7.3 U3.5 U11.4 U23.22 | length 45.5
  Top Layer w0.18: U11.4 87.1,74.4 90,71.5 v1(104.1,71.5) U23.22 ; U3.5 v1(92.37,62.83)
  Bottom Layer w0.18: v1(92.37,62.83) 93.1,63.56 v1(93.1,71.5) ; v1(104.1,71.5) 108.601,71.5 109.6,72.5 RP7.3
SENS_A_7: RP7.4 U3.11 U12.4 U23.21 | length 37.1
  Top Layer w0.18: v1(94.9,64.1) U3.11 ; U12.4 95.1,76.4 94.9,76.2 94.9,72.001 v1(104.6,72.001) U23.21
  Bottom Layer w0.18: v1(94.9,64.1) v1(94.9,72) ; v1(104.6,72.001) 108.401,72.001 109.7,73.3 RP7.4
SENS_A_8: RP6.1 U1.7 U13.4 U23.18 | length 34.8
  Top Layer w0.18: U13.4 103.1,76.5 103.8,75.8 118.9,75.8 119.899,74.801 v1@119.899,72.001 ; U23.18 v1@119.899,72.001 ; v1(119.9,72) v1@119.899,72.001 ; U1.7 124.19,72.01 124.2,72 v1(124.9,72)
  Bottom Layer w0.18: RP6.1 118.7,73.3 119.3,72.7 119.3,72.3 119.6,72 v1(119.9,72) v1(124.9,72)
SENS_A_9: RP6.2 U1.5 U14.4 U23.17 | length 29.2
  Top Layer w0.18: U14.4 111.1,76.6 111.5,76.2 119.1,76.2 120.399,74.901 v1(120.399,71.501) ; U23.17 v1@120.3,71.501 ; v1(124.5,71.5) 126.4,71.5 126.73,71.83 U1.5
  Bottom Layer w0.18: RP6.2 118.5,72.5 119.495,71.505 120.395,71.505 v1(120.399,71.501) 124.499,71.501 v1(124.5,71.5)
SENS_A_10: RP6.3 U2.7 U15.4 U23.16 | length 30.8
  Top Layer w0.18: U23.16@116.702,71 v1(120.9,71) 120.9,75 119.1,76.8 U15.4 ; v1(124.9,71) 133.9,71 134.49,71.59 U2.7
  Bottom Layer w0.18: RP6.3 118.7,71.7 119.4,71 v1(120.9,71) v1(124.9,71)
SENS_A_11: RP6.4 U2.5 U16.4 U23.15 | length 38.4
  Top Layer w0.18: U23.15@116.702,70.5 v1(121.4,70.5) 121.4,75.1 122.9,76.6 126.9,76.6 127.1,76.8 U16.4 ; v1(124.5,70.5) 136.1,70.5 137.03,71.43 U2.5
  Bottom Layer w0.18: RP6.4 118.8,70.9 119.2,70.5 v1(121.4,70.5) v1(124.5,70.5)
SENS_A_12: RP5.1 U2.11 U17.4 U23.14 | length 48
  Top Layer w0.18: U23.14@116.702,70 v1(121.9,70) 121.9,75 123.1,76.2 134.7,76.2 135.1,76.6 U17.4 ; v1(124.9,70) 137.5,70 138.3,69.2 U2.11
  Bottom Layer w0.18: RP5.1 118.5,69.8 118.7,70 v1(121.9,70) v1(124.9,70)
SENS_A_13: RP5.2 U2.9 U18.4 U23.13 | length 53.8
  Top Layer w0.18: U23.13@116.702,69.5 v1(122.4,69.5) 122.4,74.9 123.3,75.8 142.4,75.8 143.1,76.5 U18.4 ; v1(124.5,69.5) 135.4,69.5 135.76,69.14 U2.9
  Bottom Layer w0.18: RP5.2 118.4,69 118.9,69.5 v1(122.4,69.5) v1(124.5,69.5)
SENS_A_14: RP5.3 U1.11 U19.4 U23.12 | length 54.4
  Top Layer w0.18: U23.12@116.702,69 v1(122.9,69) 122.9,74.8 123.5,75.4 150.4,75.4 151.1,76.1 U19.4 ; v1(124.9,69) 127.8,69 128,68.8 U1.11
  Bottom Layer w0.18: RP5.3 118.4,68.2 119.2,69 v1(122.9,69) v1(124.9,69)
SENS_A_15: RP5.4 U1.9 U20.4 U23.11 | length 59.9
  Top Layer w0.18: U23.11 v1@123.399,68.501 ; v1(123.4,68.5) 123.4,74.7 123.7,75 158.3,75 159.1,75.8 U20.4 ; v1(124.9,68.3) 124.9,68.226 124.826,68.3 U1.9@125.6,68.3
  Bottom Layer w0.18: RP5.4 118.4,67.4 119.5,68.5 v1(123.4,68.5) 124.7,68.5 v1(124.9,68.3)
SENS_D_0: RP9.4 U4.13 U24.11 | length 41.5
  Top Layer w0.18: v1(100.205,92.095) U24.11 104.095,92.095 105,93 RP9.4 ; v1(101.44,66.64) U4.13
  Bottom Layer w0.18: v1(100.205,92.095) 100.2,92.09 100.2,88.5 96.4,84.7 96.4,77.2 97.8,75.8 101,75.8 101.44,75.36 v1(101.44,66.64)
SENS_D_1: RP9.3 U4.14 U24.12 | length 40.3
  Top Layer w0.18: v1(100.7,93.3) 100.765,93.365 U24.12 103.865,93.365 104.3,93.8 RP9.3 ; v1(102,67.9) 105.424,67.9 U4.14
  Bottom Layer w0.18: v1(100.7,93.3) 100.7,88.1 96.9,84.3 96.9,77.6 98.1,76.4 101.3,76.4 102,75.7 v1(102,67.9)
SENS_D_2: RP9.2 U4.1 U24.13 | length 36.7
  Top Layer w0.18: v1(98.9,67.9) 99.956,67.9 U4.1 ; v1(100.7,94.6) RP9.2
  Bottom Layer w0.18: v1(98.9,67.9) 98.9,73.8 95.9,76.8 95.9,85.12 99.71,88.93 99.71,93.61 v1(100.7,94.6)
SENS_D_3: RP9.1 U4.2 U24.14 | length 40.2
  Top Layer w0.18: v1(98.3,66.64) U4.2 ; v1(100.7,95.9) 100.705,95.905 U24.14 103.995,95.905 104.5,95.4 RP9.1
  Bottom Layer w0.18: v1(98.3,66.64) 98.3,73.6 95.4,76.5 95.4,85.3 99.2,89.1 99.2,94.4 v1(100.7,95.9)
SENS_D_4: RP10.4 U3.1 U24.3 | length 37.3
  Top Layer w0.18: v1(89.41,67.91) U3.1 ; RP10.4 94.5,95.4 v1(95,95.9) U24.3@96.422,95.9
  Bottom Layer w0.18: v1(89.41,67.91) 89.41,68.71 93.7,73 93.7,94.6 v1(95,95.9)
SENS_D_5: RP10.3 U3.14 U24.4 | length 34.7
  Top Layer w0.18: RP10.3 v1(95,94.6) 95.035,94.635 U24.4 ; U3.14 97.09,67.91 v1(97.1,67.9)
  Bottom Layer w0.18: v1(95,94.6) 94.3,93.9 94.3,76.1 97.1,73.3 v1(97.1,67.9)
SENS_D_6: RP10.2 U3.2 U24.5 | length 36.5
  Top Layer w0.18: v1(88.7,66.64) U3.2 U3.2@90.866,66.64 ; RP10.2 92.7,93.8 v1(93.1,93.4) U24.5@96.392,93.4
  Bottom Layer w0.18: v1(88.7,66.64) 88.7,68.9 93.1,73.3 v1(93.1,93.4)
SENS_D_7: RP10.1 U3.13 U24.6 | length 34.1
  Top Layer w0.18: RP10.1 90.85,92.905 94.095,92.905 v1(94.9,92.1) 96.422,92.1 U24.6 ; U3.13 v1(97.64,66.64)
  Bottom Layer w0.18: v1(94.9,92.1) 94.9,76.3 97.64,73.56 v1(97.64,66.64)
SENS_D_8: RP11.4 U1.1 U25.11 | length 33.6
  Top Layer w0.18: v1(127.5,92) U25.11@128.878,92 ; U25.11 132.295,92.095 133.2,93 RP11.4 ; v1(131.81,71.91) U1.1
  Bottom Layer w0.18: v1(127.5,92) 126.7,92 126.3,91.6 126.3,88.3 127.9,86.7 129.9,86.7 131.81,84.79 v1(131.81,71.91)
SENS_D_9: RP11.3 U1.2 U25.12 | length 35.3
  Top Layer w0.18: v1(127.5,93.365) U25.12 132.565,93.365 133,93.8 RP11.3 ; v1(130.5,71.9) 130.54,71.94 U1.2
  Bottom Layer w0.18: v1(127.5,93.365) 126.265,93.365 125.3,92.4 125.3,87.8 127.4,85.7 129.3,85.7 130.5,84.5 v1(130.5,71.9)
SENS_D_10: RP11.2 U2.1 U25.13 | length 36.8
  Top Layer w0.18: U25.13 v1(132.435,94.635) 132.47,94.6 RP11.2 ; v1(142.11,71.31) U2.1
  Bottom Layer w0.18: v1(132.435,94.635) 132.435,92.365 137.5,87.3 140.1,87.3 142.11,85.29 v1(142.11,71.31)
SENS_D_11: RP11.1 U2.2 U25.14 | length 38
  Top Layer w0.18: U25.14 v1(131.905,95.905) 132.995,95.905 133.5,95.4 RP11.1 ; v1(140.5,85) v1(140.5,86.2) ; v1(140.84,71.26) U2.2
  Bottom Layer w0.18: v1(131.905,95.905) 131.905,92.295 137.3,86.9 139.8,86.9 v1(140.5,86.2) ; v1(140.5,85) 140.84,84.66 v1(140.84,71.26)
SENS_D_12: RP12.4 U2.13 U25.3 | length 47.2
  Top Layer w0.18: RP12.4 121,95.4 121.505,95.905 U25.3 125.195,95.905 126.5,94.6 126.5,91.9 127.1,91.3 v1(127.5,91.3) ; v1(140.8,69.2) 140.84,69.16 U2.13
  Bottom Layer w0.18: v1(127.5,91.3) 127.2,91.3 126.9,91 126.9,88.5 128.1,87.3 130.2,87.3 132.3,85.2 139.4,85.2 140.2,84.4 140.2,69.8 v1(140.8,69.2)
SENS_D_13: RP12.3 U2.14 U25.4 | length 46.3
  Top Layer w0.18: RP12.3 123.192,94.6 U25.4 125.265,94.635 125.9,94 125.9,91.8 127.1,90.6 v1(127.5,90.6) ; v1(142.1,69.1) 142.11,69.09 U2.14
  Bottom Layer w0.18: v1(127.5,90.6) 127.5,88.5 128.3,87.7 130.4,87.7 132.5,85.6 140.8,85.6 141.5,84.9 141.5,69.7 v1(142.1,69.1)
SENS_D_14: RP12.2 U1.13 U25.5 | length 34.8
  Top Layer w0.18: RP12.2 120.7,93.8 121.135,93.365 U25.5 124.635,93.365 v1(124.7,93.3) ; U1.13 v1(130.54,68.96)
  Bottom Layer w0.18: v1(124.7,93.3) 124.7,87.6 127.2,85.1 129,85.1 129.9,84.2 129.9,69.6 v1(130.54,68.96)
SENS_D_15: RP12.1 U1.14 U25.6 | length 34.3
  Top Layer w0.18: RP12.1 120.4,93 121.4,92 124.6,92 v1(125.8,90.8) ; U1.14 v1(131.81,68.99)
  Bottom Layer w0.18: v1(125.8,90.8) 125.8,88.1 127.7,86.2 129.7,86.2 131.2,84.7 131.2,69.6 v1(131.81,68.99)
VREF: C5.2 C8.2 C13.2 C14.2 C17.2 R2.1 R4.3 R7.3 U21.6 U21.8 U22.6 U23.4 | length 68.4
  Top Layer w0.18: U23.4 C8.2@119.624,65.001 ; C8.2 119.925,64.7 120.5,64.7 120.6,64.6 120.6,59.5 121,59.1 128.1,59.1 129.375,60.375 C14.2 C13.2 131.775,60.375 131.9,60.5 ; 121.975,59.125 U22.6 121.975,61.475 122.2,61.7 R4.3@124.575,61.7 ; R2.1 131.7,64.9 131.9,64.7 131.9,63.9 132.065,63.735 U21.6 134.765,63.735 135,63.5 135,61.5 134.695,61.195 U21.8 132.095,61.195 131.9,61 131.9,60.5 ; R7.3 160.515,61.36 159.655,60.5 131.9,60.5
pads on no net: U21.7 U22.1 U22.3 U22.7 U22.8 U23.1 U23.2 U23.37 U23.38 U24.7 U25.7

## Polygon pours and split planes (outlines as drawn)
AGND on Bottom Layer "g" (solid, remove dead copper, pour order 2): 32.5,102 32.5,58 167.5,58 167.5,102

## Keep-outs
Keep-Out Layer:
  circle w0.1: c52,80 r2.5
  circle w0.1: c100,80 r2.5
  circle w0.1: c148,80 r2.5
  lines w0.1: 32.5,58 32.5,102 167.5,102 167.5,58 32.5,58 ; 47,61.5 cw(c47,64) 47,66.5 57,66.5 cw(c57,64) 57,61.5 47,61.5 ; 47,93.5 cw(c47,96) 47,98.5 57,98.5 cw(c57,96) 57,93.5 47,93.5 ; 143,61.5 cw(c143,64) 143,66.5 153,66.5 cw(c153,64) 153,61.5 143,61.5 ; 143,93.5 cw(c143,96) 143,98.5 153,98.5 cw(c153,96) 153,93.5 143,93.5

## Other copper
Top Layer:
  rectangle net AGND: 136.5,60.8 139.9,65.4
  rectangle net AGND: 114.5,61.7 117.7,62.9
  rectangle net AGND: 118.275,62.975 120.125,64.275
  rectangle net AGND: 118.275,66.925 123.125,67.525
  rectangle net AVCC: 118.275,66.075 123.125,66.675
  rectangle net AGND: 107.075,66.2 108.9,67.375
  rectangle net AGND: 115.3,67.35 119.1,68.15
  rectangle net AGND: 112.4,63 115.7,65.7
  rectangle net AGND: 111.9,64.8 115.7,72.9

## Silkscreen, mask and mechanical layers (free items; w line width, h text height)
Top Overlay:
  lines w0.2: 32.5,74.5 167.5,74.5 ; 32.5,85.5 167.5,85.5 ; 38,80 42,80 ; 40,77 40,83 ; 46,80 50,80 ; 48,77 48,83 ; 54,80 58,80 ; 56,77 56,83 ; 62,80 66,80 ; 64,77 64,83 ; 70,80 74,80 ; 72,77 72,83 ; 78,80 82,80 ; 80,77 80,83 ; 86,80 90,80 ; 88,77 88,83 ; 94,80 98,80 ; 96,77 96,83 ; 102,80 106,80 ; 104,77 104,83 ; 110,80 114,80 ; 112,77 112,83 ; 118,80 122,80 ; 120,77 120,83 ; 126,80 130,80 ; 128,77 128,83 ; 134,80 138,80 ; 136,77 136,83 ; 142,80 146,80 ; 144,77 144,83 ; 150,80 154,80 ; 152,77 152,83 ; 158,80 162,80 ; 160,77 160,83
Mechanical 1:
  circle w0.1: c52,80 r1.3
  circle w0.1: c100,80 r1.3
  circle w0.1: c148,80 r1.3
  lines w0.1: 32.5,58 32.5,102 167.5,102 167.5,58 32.5,58 ; 47,62.45 cw(c47,64) 47,65.55 57,65.55 cw(c57,64) 57,62.45 47,62.45 ; 47,94.45 cw(c47,96) 47,97.55 57,97.55 cw(c57,96) 57,94.45 47,94.45 ; 143,62.45 cw(c143,64) 143,65.55 153,65.55 cw(c153,64) 153,62.45 143,62.45 ; 143,94.45 cw(c143,96) 143,97.55 153,97.55 cw(c153,96) 153,94.45 143,94.45